# Altium PCB Eln1Project.PcbDoc
Units mm, origin at the board's own origin, x right, y up, seen from the top; angles counter-clockwise.
Board outline 30 x 30 mm, 4 copper layers (Top Layer, Layer 2, Layer 3, Bottom Layer), stack 1.57 mm thick; 31 components, 25 nets, 112 pads, 11 vias.
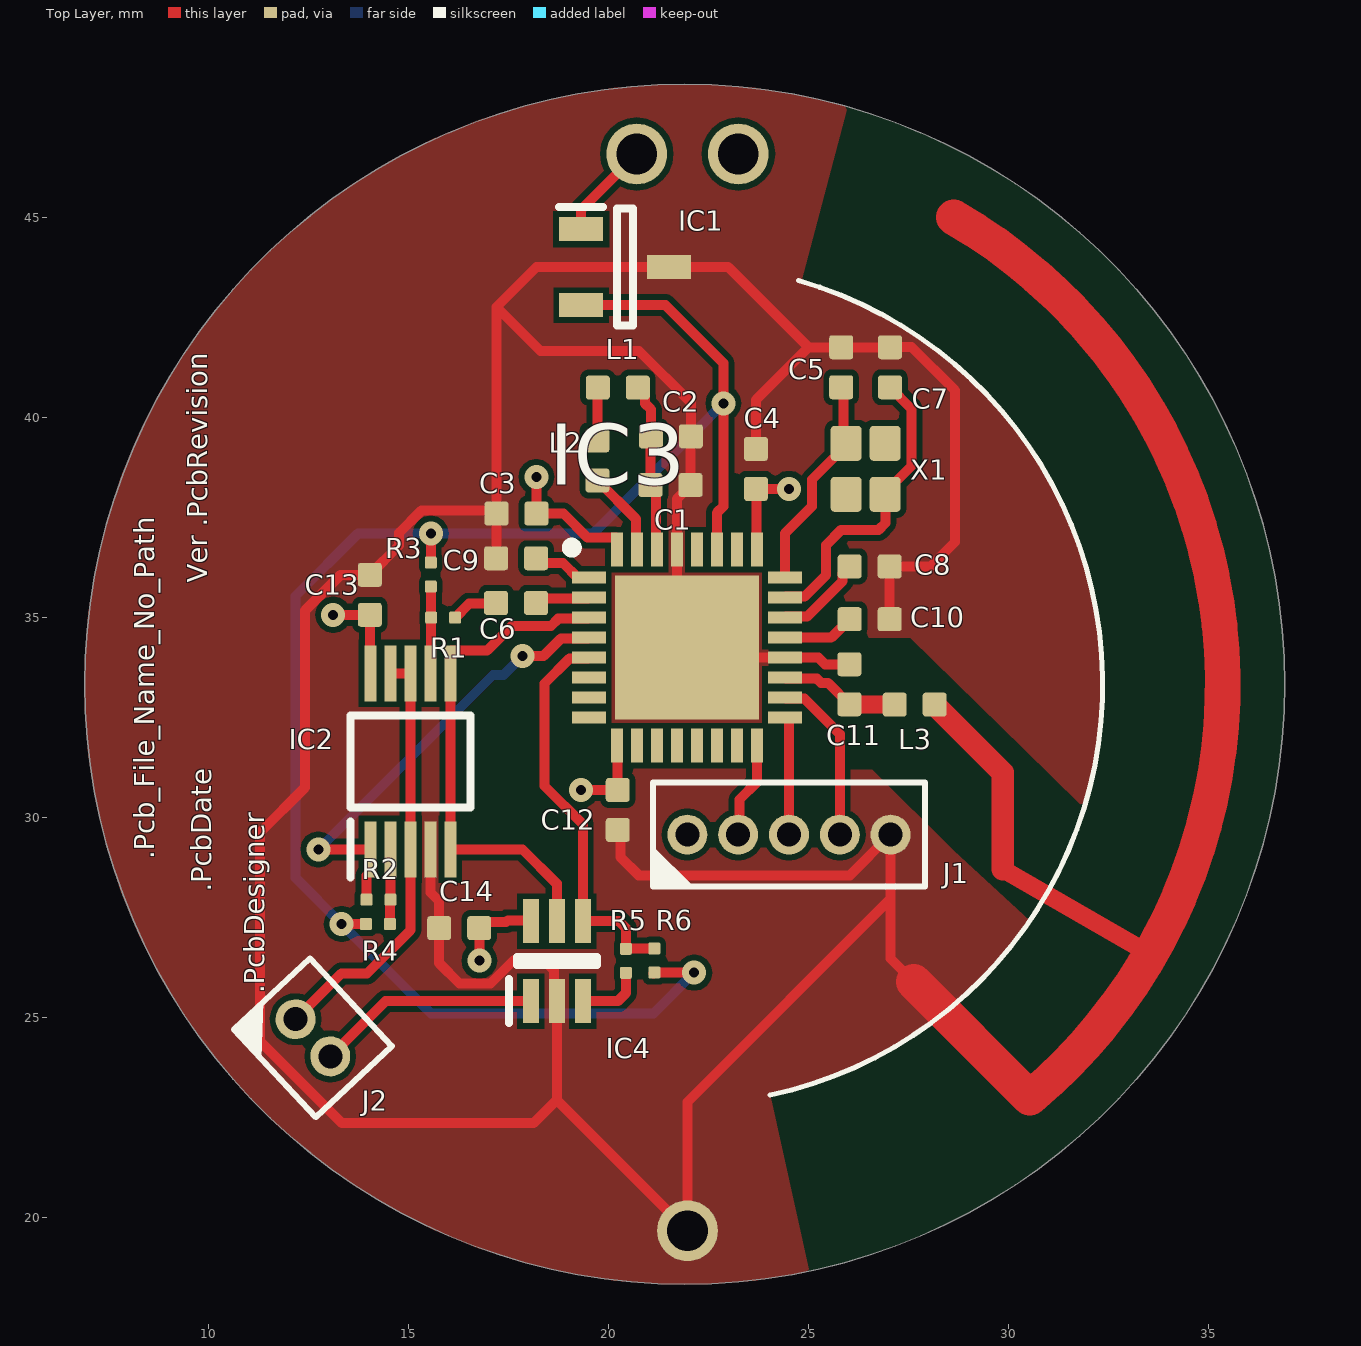
[diagram p0: Top Layer view]
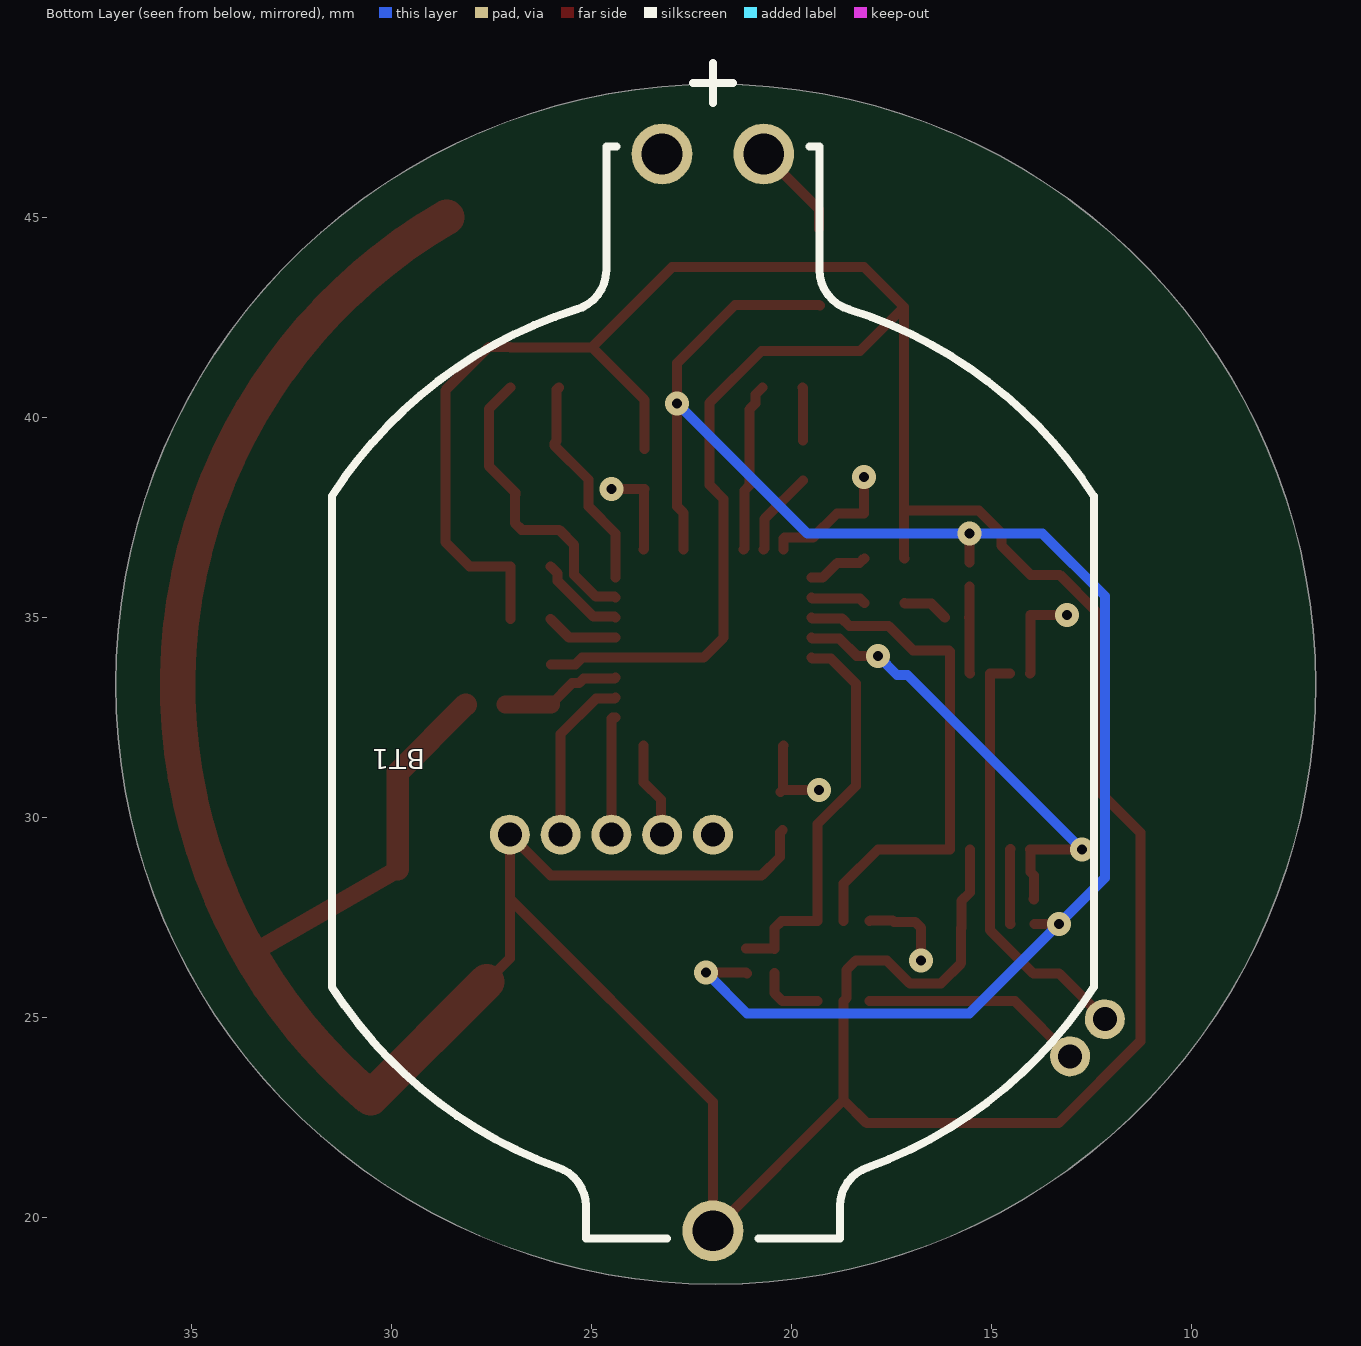
[diagram p1: Bottom Layer view, seen from below]
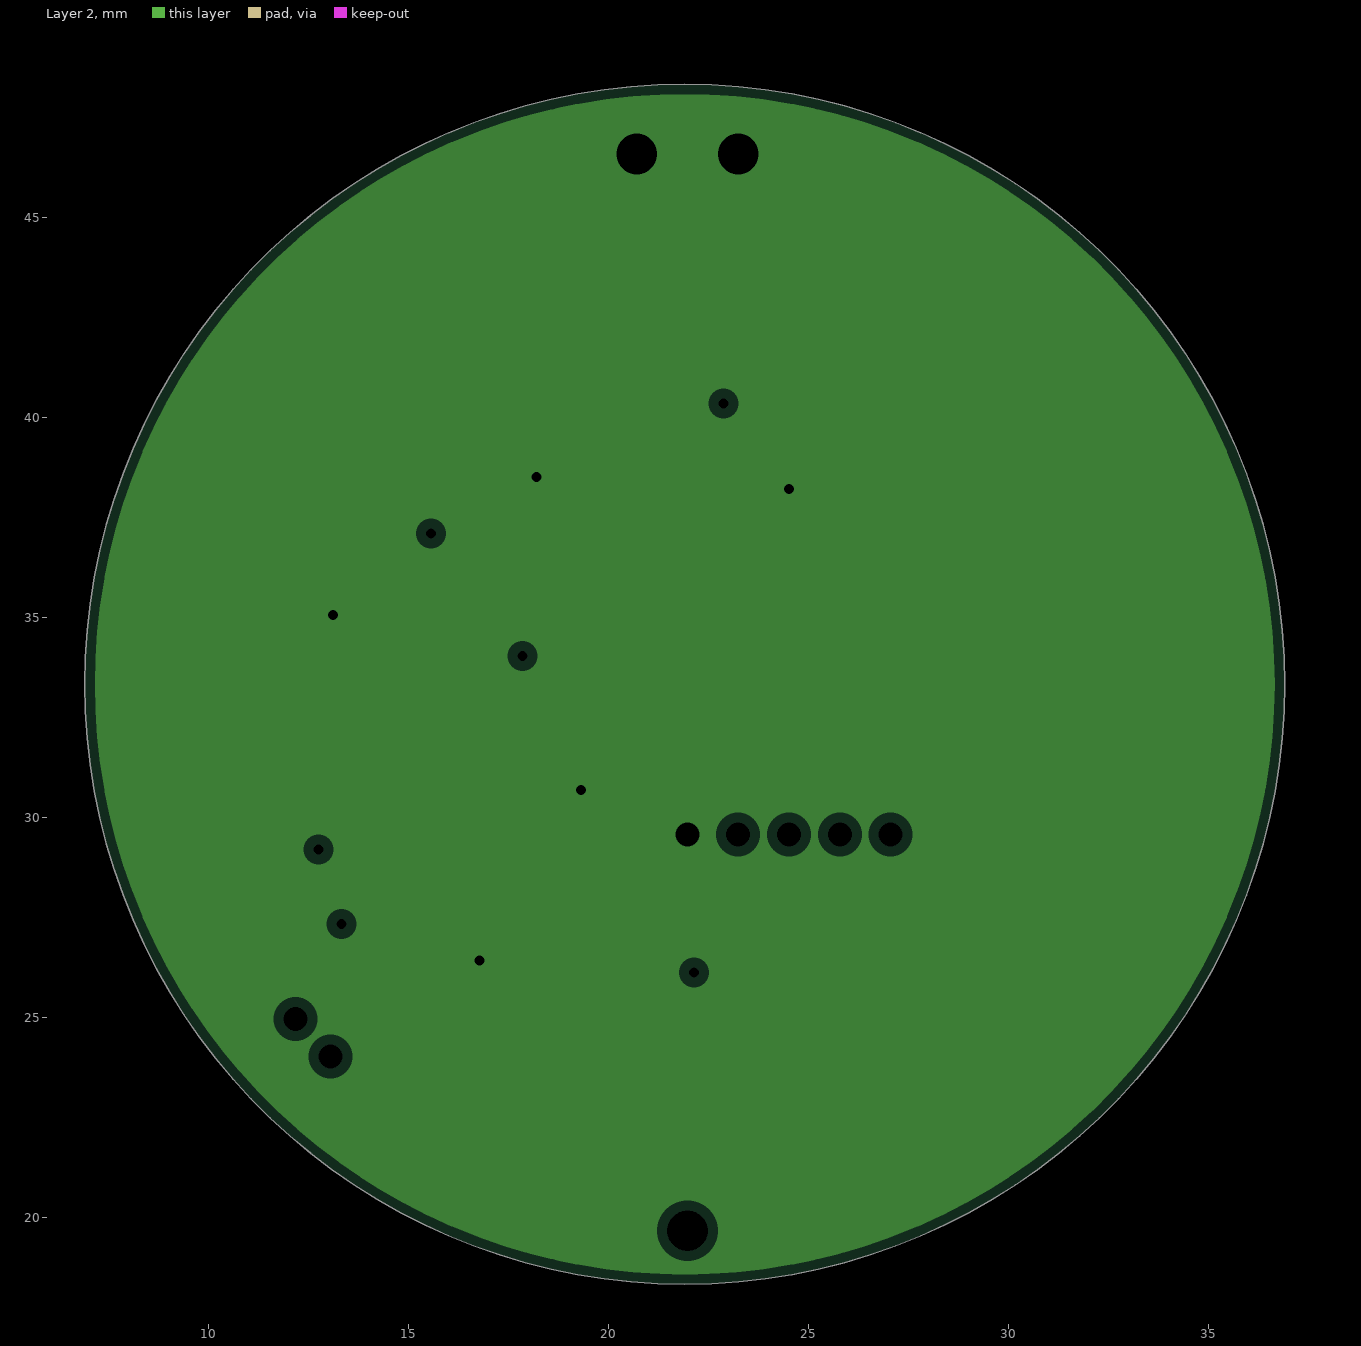
[diagram p2: Layer 2, clearances drawn from the general rule]

## Layer stack, top to bottom
Top Solder: solder mask 0.1, Solder Resist, Dk 3.5
Top Layer: signal copper 0.035
Dielectric 1: core 0.36, FR-4, Dk 4.2
Layer 2: plane copper 0.035, net VCC
Dielectric 3: prepreg 0.71, Dk 4.2
Layer 3: signal copper 0.035
Dielectric 2: core 0.36, Dk 4.2
Bottom Layer: signal copper 0.035
Bottom Solder: solder mask 0.1, Solder Resist, Dk 3.5

## Board outline
21.895,18.325 cw(c21.895,33.325) 6.895,33.325 cw(c21.895,33.325) 21.895,48.325 cw(c21.895,33.325) 36.895,33.325 cw(c21.895,33.325)

## Design rules (kind name [scope] priority, off if disabled: settings)
AcuteAngle [All] p1 off: minimum=9.00000000000000E+0001 checktracksonly=TRUE
AssemblyTestPointUsage [All] p1 off:
AssemblyTestpoint [All] p1 off: testpointundercomponent=TRUE minsize=1.016 maxsize=2.54 preferedsize=1.524 minholesize=0 maxholesize=1.016 preferedholesize=0.813 testpointgrid=0.025 usegrid=TRUE gridtolerance=0 allowsidetop=TRUE allowsidebottom=TRUE
BoardOutlineClearance [All] p1 off: gap=0.25 ignorepadtopadclearanceinfootprint=FALSE
Clearance [All] p1: gap=0.15 ignorepadtopadclearanceinfootprint=FALSE except(0: Arc-Hole Track-Hole SMDPad-Hole THPad-Hole Via-Hole Fill-Hole Poly-Hole Region-Hole Text-Hole)
ComponentClearance [All] p1 off: gap=0.25 collisioncheckmode=3 verticalgap=0.25 showdistances=FALSE
DiffPairsRouting [All] p1 off: maxlimit=0.254 minlimit=0.254 mostfreqgap=0.254 toplayer_minwidth=0.381 toplayer_maxwidth=0.381 toplayer_prefwidth=0.381 midlayer2_minwidth=0.381 midlayer2_maxwidth=0.381 midlayer2_prefwidth=0.381 bottomlayer_minwidth=0.381 bottomlayer_maxwidth=0.381 bottomlayer_prefwidth=0.381 maxuncoupledlength=12.7
FabricationTestPointUsage [All] p1 off: valid=0 allowmultiple=FALSE
FabricationTestpoint [All] p1 off: side=3 testpointundercomponent=TRUE minsize=1.016 maxsize=2.54 preferedsize=1.524 minholesize=0 maxholesize=1.016 preferedholesize=0.813 testpointgrid=0.025 allowsidetop=TRUE allowsidebottom=TRUE usegrid=TRUE gridtolerance=0
FanoutControl Fanout_BGA [IsBGA] p1 off: bgadir=Out bgaviamode=Centered fanoutstyle=Auto fanoutdirection=Alternating viagrid=0.025 // Fanout_BGA (Default Rule)
FanoutControl Fanout_LCC [IsLCC] p2 off: bgadir=Out bgaviamode=Centered fanoutstyle=Auto fanoutdirection=Alternating viagrid=0.025 // Fanout_LCC (Default Rule)
FanoutControl Fanout_SOIC [IsSOIC] p3 off: bgadir=Out bgaviamode=Centered fanoutstyle=Auto fanoutdirection=Alternating viagrid=0.025 // Fanout_SOIC (Default Rule)
FanoutControl Fanout_Small [(CompPinCount < 5)] p4 off: bgadir=Out bgaviamode=Centered fanoutstyle=Auto fanoutdirection=OutThenIn viagrid=0.025 // Fanout_Small (Default Rule)
FanoutControl Fanout_Default [All] p5 off: bgadir=Out bgaviamode=Centered fanoutstyle=Auto fanoutdirection=Alternating viagrid=0.025 // Fanout_Default (Default Rule)
Height [All] p1 off: minheight=0 maxheight=25.4 prefheight=12.7
HoleSize [All] p1: absolutevalues=TRUE maxlimit=3 minlimit=0.25 maxpercent=80.000 minpercent=20.000
HoleToHoleClearance [All] p1 off: gap=0.25 allowstackedmicrovias=TRUE
LayerPairs [All] p1 off: enforce=TRUE
MinimumAnnularRing [All] p1 off: minimumring=0.175
MinimumSolderMaskSliver [All] p1 off: minsoldermaskwidth=0
NetAntennae [All] p1 off: netantennaetolerance=0
PasteMaskExpansion [All] p1 off: expansion=0
PlaneClearance [All] p1: clearance=0.25
PlaneConnect [All] p1: planeconnectstyle=Direct reliefexpansion=0.5 reliefentries=4 reliefconductorwidth=0.25 reliefairgap=0.25
PolygonConnect [All] p1: connectstyle=Direct reliefconductorwidth=0.25 reliefentries=4 polygonreliefangle="90 Angle" airgapwidth=0.25
RoutingCorners [All] p1 off: cornerstyle=45-Degree minsetback=2.5 maxsetback=2.5
RoutingLayers [All] p1 off: top layer_v5=TRUE mid layer 2_v5=TRUE bottom layer_v5=TRUE
RoutingPriority [All] p1 off: routingpriority=0
RoutingTopology [All] p1 off: topology=Shortest
RoutingVias [All] p1: holewidth=0.25 width=0.6 viastyle="Through Hole" minholewidth=0.15 minwidth=0.5 maxholewidth=0.9 maxwidth=1.5 useviatemplates=TRUE viatemplateguid#1={857F750E-5D3C-416E-893E-D7E0D3E4223C} viatemplatename#1=v60h25m0mx0
SilkToBoardRegionClearance [All] p1 off:
SilkToSilkClearance [All] p1 off: silktosilkclearance=0
SilkToSolderMaskClearance [IsPad] p1 off: minsilkscreentomaskgap=0 clearancetoexposedcopper=TRUE
SolderMaskExpansion [All] p1: expansion=0
Width [All] p1: maxlimit=4 minlimit=0.15 preferedwidth=0.25
3 further rules are at their usual default settings.

## Components (designator, comment, footprint, x,y, rotation, side; value= is the part's Value field where it differs from the comment)
BT1 "120591-1" TECO-120591-1-2_V 21.963,33.122 r270 bottom
C1 "1uF" "CAPACITOR 1005 REFLOW" 21.539,38.303 r180 top
C2 "N.C." "CAPACITOR 1005 REFLOW" 21.547,39.522 r180 top
C3 "4.7uF" "CAPACITOR 1005 REFLOW" 17.686,37.592 r0 top
C4 "100nF" "CAPACITOR 1005 REFLOW" 23.673,38.71 r270 top
C5 "12pF" "CAPACITOR 1005 REFLOW" 25.806,41.25 r90 top
C6 "10nF" "CAPACITOR 1005 REFLOW" 17.678,35.357 r0 top
C7 "12pF" "CAPACITOR 1005 REFLOW" 27.026,41.25 r90 top
C8 "100pF" "CAPACITOR 1005 REFLOW" 26.518,36.271 r0 top
C9 "100nF" "CAPACITOR 1005 REFLOW" 17.678,36.474 r0 top
C10 "N.C." "CAPACITOR 1005 REFLOW" 26.518,34.95 r0 top
C11 "0.8pF" "CAPACITOR 1005 REFLOW" 26.01,33.325 r270 top
C12 "100nF" "CAPACITOR 1005 REFLOW" 20.218,30.183 r90 top
C13 "100nF" "CAPACITOR 1005 REFLOW" 14.021,35.56 r270 top
C14 "100nF" "CAPACITOR 1005 REFLOW" 16.256,27.229 r0 top
IC1 "ISL21080CIH315Z-TK" SOT95P237X112-3N 20.404,43.754 r0 top
IC2 "MAX9913EUB+" SOP50P490X110-10N 15.037,31.394 r90 top
IC3 "NRF52810-QCAA-T" QFN50P500X500X80-33N 21.946,34.239 r0 top
IC4 "MAX9911EXT-T" SOT65P218X110-6N 18.694,26.4 r90 top
J1 "*" "PinHeader1x5 P1.27" 24.5,29.566 r0 top
J2 "*" "PinHeader1x2 P1.27" 12.598,24.486 r313 top
L1 "15nH" "INDUCTOR 1005 REFLOW" 20.221,40.742 r0 top
L2 "10uH" "INDUCTOR 1005 REFLOW" 19.71,38.921 r90 top
L3 "3.9nH" "INDUCTOR 1005 REFLOW" 27.644,32.817 r0 top
R1 "65k" "RESISTOR 0603 REFLOW" 15.854,34.989 r0 top
R2 "20k" "RESISTOR 0603 REFLOW" 14.237,27.94 r180 top
R3 "10k" "RESISTOR 0603 REFLOW" 15.545,36.068 r270 top
R4 "10k" "RESISTOR 0603 REFLOW" 14.224,27.33 r0 top
R5 "20k" "RESISTOR 0603 REFLOW" 20.422,26.411 r270 top
R6 "10k" "RESISTOR 0603 REFLOW" 21.133,26.416 r270 top
X1 "32Mhz" "Crystal C2.0x1.6 Abracon ABM11W" 26.416,38.71 r270 top

## Footprints (in the part's own frame and the unit in brackets; to place one, negate y for a bottom-side part, rotate by r counter-clockwise, add the part's x,y. Pads: shape width x height; smd on the part's side, far side on the other; paste and mask are expansions set on the pad)
"CAPACITOR 1005 REFLOW" [mm] "Capacitor SMD 1.0x0.5mm (0402-imperial)"
  rrect25% 0.6x0.6 smd: 1(-0.5,0) 2(0.5,0)
  body extent -0.5,-0.25 0.5,0.25, height 0.5
"Crystal C2.0x1.6 Abracon ABM11W" [mm] "Crystal C2.0x1.6 Abracon ABM11W, Height 0.5mm"
  rrect25% 0.875x0.775 smd: 1(-0.637,-0.487) 2(0.637,-0.487) 3(0.637,0.487) 4(-0.637,0.487)
  body extent -1,-0.8 1,0.8, height 0.5
"INDUCTOR 1005 REFLOW" [mm] "Inductor SMD 1.0x0.5mm (0402-imperial)"
  rrect25% 0.6x0.6 smd: 1(-0.5,0) 2(0.5,0)
  body extent -0.5,-0.25 0.5,0.25, height 0.35
"PinHeader1x2 P1.27" [mm] "Plug connector"
  round 1 hole 0.6: 1(-0.635,0) 2(0.635,0)
  silkscreen extent -1.51,-1.3 1.5,1.3, body extent -1.27,-1.1 1.27,1.1, height 4
"PinHeader1x5 P1.27" [mm] "Plug connector"
  round 1 hole 0.6: 1(-2.54,0) 2(-1.27,0) 3(0,0) 4(1.27,0) 5(2.54,0)
  silkscreen extent -3.4,-1.31 3.4,1.3, body extent -3.17,-1.1 3.17,1.1, height 4
QFN50P500X500X80-33N [mm]
  rect 0.85x0.3 smd: 1(-2.45,1.75) 2(-2.45,1.25) 3(-2.45,0.75) 4(-2.45,0.25) 5(-2.45,-0.25) 6(-2.45,-0.75) 7(-2.45,-1.25) 8(-2.45,-1.75) 17(2.45,-1.75) 18(2.45,-1.25) 19(2.45,-0.75) 20(2.45,-0.25) 21(2.45,0.25) 22(2.45,0.75) 23(2.45,1.25) 24(2.45,1.75)
  rect 0.3x0.85 smd: 9(-1.75,-2.45) 10(-1.25,-2.45) 11(-0.75,-2.45) 12(-0.25,-2.45) 13(0.25,-2.45) 14(0.75,-2.45) 15(1.25,-2.45) 16(1.75,-2.45) 25(1.75,2.45) 26(1.25,2.45) 27(0.75,2.45) 28(0.25,2.45) 29(-0.25,2.45) 30(-0.75,2.45) 31(-1.25,2.45) 32(-1.75,2.45)
  rect 3.6x3.6 smd: 33(0,0)
  silkscreen extent -3,2.38 -2.75,2.62, body extent -3.68,-2.5 5.08,3.3, height 1.1
"RESISTOR 0603 REFLOW" [mm] "Resistor SMD 0.6x0.3mm (0201-imperial)"
  rrect25% 0.3x0.3 smd: 1(-0.3,0) 2(0.3,0)
  body extent -0.3,-0.15 0.3,0.15, height 0.25
SOP50P490X110-10N [mm]
  rect 1.4x0.3 smd: 1(-2.2,1) 2(-2.2,0.5) 3(-2.2,0) 4(-2.2,-0.5) 5(-2.2,-1) 6(2.2,-1) 7(2.2,-0.5) 8(2.2,0) 9(2.2,0.5) 10(2.2,1)
  silkscreen extent -2.9,-1.5 1.15,1.5, body extent -2.53,-1.52 2.53,1.52, height 1.09
SOT65P218X110-6N [mm]
  rect 1.1x0.4 smd: 1(-1,0.65) 2(-1,0) 3(-1,-0.65) 4(1,-0.65) 5(1,0) 6(1,0.65)
  silkscreen extent -1.55,-1 0.1,1.2, body extent -1.78,-1.1 1.2,1.4, height 1.1
SOT95P237X112-3N [mm]
  rect 1.1x0.6 smd: 1(-1.1,0.95) 2(-1.1,-0.95) 3(1.1,0)
  silkscreen extent -1.65,-1.46 0.2,1.5, body extent -2.67,-1.5 1.25,2.41, height 1.2
TECO-120591-1-2_V [mm] "Lithium Battery Holder"
  round 1.52 hole 1.02: 1(-13.46,-1.27) 1(-13.46,1.27) 2(13.46,0)
  silkscreen extent -15.74,-9.53 13.65,9.53, body extent -13.65,-9.53 13.65,9.52, height 6.41

## Part data
BT1: "Lithium Battery Holder for CR2032 3V Cell", Manufacturer="TE Connectivity", AccessRights=2147483647, Body Shape="Horizontal Cylindrical", ComponentLink1Description="Manufacturer URL", ComponentLink1URL=http://www.te.com/, ComponentLink2Description=Datasheet, ComponentLink2URL=http://www.te.com/commerce/DocumentDelivery/DDEController?Action=showdoc&DocId=Customer+Drawing%7F120591%7FH%7Fpdf%7FEnglish%7FENG_CD_120591_H.pdf%7F120591-1, ContentType="Unified Component", ContentTypeGUID=CB3C11C4-E317-11DF-B822-12313F0024A2, DatasheetVersion="Rev. H, 01/2013", Folder="Unified Components\Components\TE Connectivity\Connectors & Connector Components\Power Products\Battery Interconnection Products\", FolderGUID=A6761B51-D489-48A3-9180-F4808F45AB79, ItemGUID=B2C50140-681E-4F62-8DBB-9728605318CE, ItemHRID=CMP-0438-00001, LifeCycle=Released, LifeCycleStateGUID=61E382EE-6656-4F12-9E24-BE9327104A25, Mounting Technology="Through Hole", PackageDescription="Lithium Battery Holder", PackageReference=120591-1, Packing Type=Tray, PartNumber=120591-1, ReleaseDate="20/08/2013 02:50:22 AM", RevisionId=1
C1 C2 C3 C4 C5 C6 C7 C8 C9 C10 C11 C12 C13 C14: library part Capacitor, "Capacitor"
IC1: "Integrated Circuit", Manufacturer_Name="Renesas Electronics", Mouser Part Number=968-ISL21080CIH315ZT, Datasheet Link=https://www.renesas.com/en-us/www/doc/datasheet/isl21080.pdf, Height=1.12mm, Manufacturer_Part_Number=ISL21080CIH315Z-TK, Mouser Price/Stock=http://www.mouser.com/Search/ProductDetail.aspx?qs=9fLuogzTs8LxZWNzls3EKw%3d%3d
IC2 IC4: "Integrated Circuit", Manufacturer_Name="Maxim Integrated", Height=1.1mm
  IC2: Datasheet Link=https://altium.componentsearchengine.com/Datasheets/1/MAX9913EUB+.pdf, Manufacturer_Part_Number=MAX9913EUB+
  IC4: Datasheet Link=https://datasheets.maximintegrated.com/en/ds/MAX9910-MAX9913.pdf, Manufacturer_Part_Number=MAX9911EXT-T
IC3: "Integrated Circuit", Manufacturer_Name="Nordic Semiconductor", Mouser Part Number=949-NRF52810-QCAA-T, RS Part Number=1697120P, Datasheet Link=https://componentsearchengine.com/Datasheets/1/nRF52810-QCAA-T.pdf, Height=0.8mm, Manufacturer_Part_Number=NRF52810-QCAA-T, Mouser Price/Stock=https://www.mouser.co.uk/ProductDetail/Nordic-Semiconductor/nRF52810-QCAA-T?qs=5aG0NVq1C4ykfpvypn%2FnAA%3D%3D, RS Price/Stock=http://uk.rs-online.com/web/p/products/1697120P
J1: library part PinHeader1x5, "Plug connector"
J2: library part PinHeader1x2, "Plug connector"
L1 L2 L3: library part Inductor, "Inductor"
R1 R2 R3 R4 R5 R6: library part Resistor, "Resistor"
X1: library part "Crystal C2.0x1.6 Abracon ABM11W", "Crystal C2.0x1.6 Abracon ABM11W"

## Via types
v1: diameter 0.6, hole 0.25, Top Layer to Bottom Layer, tented both sides, 11 vias

## Nets (pads, with @x,y where several pads share a name; then routed paths per layer and width w, separated by ;. In a path a pad name is that pad's centre, name@x,y a point inside that pad or via, vN(x,y) a via of type N, cw(c..) or ccw(c..) an arc to the next point about the centre after c; other vN are vias at no path point)
AGND: IC1.2 IC3.27 R3.1 R4.1 R6.2 | length 42.8
  Top Layer w0.25: v1(13.316,27.33) R4.1 ; R3.1 v1(15.545,37.088) ; IC1.2@19.289,42.789 IC1.2 21.407,42.804 22.86,41.351 v1(22.86,40.349) 22.86,37.775 22.696,37.61 IC3.27 ; R6.2@21.115,26.098 R6.2 v1(22.131,26.116)
  Bottom Layer w0.25: v1(22.131,26.116) 21.11,25.095 15.551,25.095 v1(13.316,27.33) 12.16,28.486 12.16,35.528 13.72,37.088 v1(15.545,37.088) 19.598,37.088 v1(22.86,40.349)
NetC1_2: C1.2 C2.2 IC3.30 L1.2 | length 4.3
  Top Layer w0.25: L1.2 20.895,40.567 20.895,40.349 21.047,40.197 C2.2 21.043,39.518 21.043,38.307 C1.2 21.171,38.172 21.171,36.714 IC3.30
NetC5_1: C5.1 IC3.24 X1.1 | length 5.4
  Top Layer w0.25: IC3.24 24.396,37.096 25.075,37.775 25.075,38.443 25.929,39.297 X1.1 25.867,39.408 25.867,40.689 C5.1
NetC6_1: C6.1 R1.2 | length 1.2
  Top Layer w0.25: R1.2 16.503,35.338 17.16,35.338 C6.1
NetC7_1: C7.1 IC3.23 X1.3 | length 7.6
  Top Layer w0.25: IC3.23 24.421,35.514 24.885,35.514 25.429,36.059 25.429,36.808 25.806,37.186 26.742,37.186 26.914,37.358 26.914,38.062 X1.3 26.903,38.122 27.566,38.785 27.566,40.209 C7.1
NetC8_1: C8.1 IC3.22 | length 2.3
  Top Layer w0.25: IC3.22 24.421,35.014 24.95,35.014 25.843,35.907 25.843,36.096 C8.1
NetC9_2: C9.2 IC3.1 | length 1.5
  Top Layer w0.25: C9.2 18.296,36.356 18.853,36.356 19.221,35.989 IC3.1
NetC10_1: C10.1 IC3.21 | length 1.8
  Top Layer w0.25: IC3.21 25.556,34.489 C10.1
NetC11_2: C11.2 IC3.19 L3.1 | length 3
  Top Layer w0.25: IC3.19 24.421,33.464 25.195,33.464 25.306,33.353 25.481,33.353 C11.2@26.014,32.821 ; L3.1@27.14,32.821 L3.1
  Top Layer w0.457: C11.2@26.014,32.821 L3.1@27.14,32.821
NetIC2_2: IC2.2 R2.1 R4.2 | length 1.9
  Top Layer w0.25: R4.2 14.53,27.337 14.53,27.934 R2.1 IC2.2 IC2.2@14.529,29.202
NetIC2_7: IC2.7 R1.1 R3.2 | length 2.2
  Top Layer w0.25: IC2.7 15.546,33.603 15.546,34.98 R1.1 15.55,34.994 R3.2@15.55,35.768
NetIC3_31: IC3.31 L2.1 | length 2.1
  Top Layer w0.25: L2.1 20.671,37.461 20.671,36.714 IC3.31
NetIC4_3: IC4.3 R5.2 | length 1.7
  Top Layer w0.25: IC4.3 20.221,25.4 20.422,25.601 R5.2
NetL1_1: L1.1 L2.2 | length 1.3
  Top Layer w0.25: L2.2 19.716,39.426 19.716,40.736 L1.1
NRESET: IC3.16 J1.2 | length 2.4
  Top Layer w0.25: J1.2 23.262,29.598 23.262,30.441 23.696,30.874 IC3.16
shdEn: IC2.5 IC2.6 IC3.3 IC4.5 | length 12.7
  Top Layer w0.25: IC4.5 18.694,28.338 17.838,29.194 IC2.5 IC2.6 16.037,34.144 16.062,34.169 16.955,34.169 17.567,34.782 18.548,34.782 18.731,34.964 19.471,34.964 IC3.3
sigIn: IC2.3 IC2.8 IC2.9 J2.1 | length 10.7
  Top Layer w0.25: J2.1 13.307,26.091 13.951,26.091 15.037,27.176 IC2.3 IC2.8 IC2.9
sigOut: IC4.1 J2.2 | length 5.6
  Top Layer w0.25: J2.2 14.411,25.4 IC4.1
SWDCLK: IC3.17 J1.3 | length 3
  Top Layer w0.25: IC3.17 24.475,32.489 24.5,32.464 J1.3
SWDIO: IC3.18 J1.4 | length 4.3
  Top Layer w0.25: IC3.18 24.421,32.964 24.885,32.964 25.77,32.079 J1.4
VCC: BT1.1 C3.2 C4.2 C12.2 C13.2 C14.2 IC1.1 IC2.10 IC3.9 IC3.25 IC3.32 IC4.6 J1.1 | length 15
  Top Layer w0.25: v1(13.106,35.06) C13.2 14.029,35.052 14.029,33.602 IC2.10 ; v1(16.76,26.416) 16.76,27.225 C14.2 16.913,27.386 17.431,27.386 17.469,27.424 18.02,27.424 IC4.6 ; v1(18.186,38.506) C3.2 18.861,37.592 19.464,36.989 20.171,36.989 20.196,36.964 IC3.32 ; v1(19.304,30.683) C12.2 ; IC1.1 19.304,45.192 BT1.1@20.693,46.582 ; IC3.9 20.207,31.778 20.207,30.695 C12.2 ; C12.2@20.27,30.632 C12.2 ; IC3.25 23.684,36.701 23.684,38.198 C4.2 v1(24.5,38.21)
Vin: C6.2 IC3.2 | length 1.4
  Top Layer w0.25: C6.2 18.286,35.464 19.471,35.464 IC3.2
Vout1: IC2.1 IC3.4 R2.2 | length 11.5
  Top Layer w0.25: v1(12.735,29.194) IC2.1 ; R2.2@13.948,27.951 R2.2 13.937,28.544 14.023,28.631 IC2.1@14.023,29.181 ; v1(17.838,34.036) 18.368,34.036 18.796,34.464 19.471,34.464 IC3.4
  Bottom Layer w0.25: v1(12.735,29.194) 17.1,33.559 17.361,33.559 v1(17.838,34.036)
Vout2: IC3.5 IC4.4 R5.1 R6.1 | length 10.1
  Top Layer w0.25: IC3.5 19.471,33.964 19.007,33.964 18.39,33.347 18.39,30.784 19.344,29.83 IC4.4 20.25,27.4 20.422,27.229 R5.1 20.424,26.714 21.13,26.714 R6.1
VSS: BT1.2 C1.1 C2.1 C3.1 C4.1 C5.2 C7.2 C8.2 C9.1 C10.2 C11.1 C12.1 C13.1 C14.1 IC1.3 IC2.4 IC3.20 IC3.29 IC3.33 IC4.2 J1.5 L3.2 | length 147.6
  Top Layer w0.25: IC2.4 15.537,28.119 15.752,27.904 15.752,27.232 C14.1 15.756,26.351 16.266,25.841 17.04,25.841 17.615,26.416 18.39,26.416 18.619,26.186 18.619,25.475 IC4.2 18.694,22.93 ; C9.1 17.182,36.478 17.182,37.588 C3.1 ; C12.1 20.284,29.618 20.284,29.008 20.742,28.55 26.024,28.55 J1.5 27.04,27.961 ; C4.1 23.673,40.437 24.986,41.75 ; C11.1 25.4,33.825 25.236,33.989 IC3.20 22.196,33.989 IC3.33 21.696,34.489 IC3.29 21.696,37.96 C1.1 22.043,38.307 22.043,39.518 C2.1 22.047,40.36 20.751,41.656 18.284,41.656 17.186,42.754 ; C10.2 C8.2 28.042,36.271 28.651,36.881 28.651,40.672 27.566,41.758 27.034,41.758 C7.2 C5.2 24.986,41.75 ; 27.616,25.889 27.04,26.465 27.04,27.961 ; C3.1 17.186,42.754 ; C3.1 17.116,37.663 15.307,37.663 14.751,37.107 14.751,36.79 C13.1 13.293,36.06 12.395,35.162 12.395,30.738 11.278,29.621 11.278,24.398 13.323,22.352 18.116,22.352 18.694,22.93 ; 17.186,42.754 18.186,43.754 IC1.3 22.981,43.754 24.986,41.75 ; 18.694,22.93 BT1.2 21.963,22.884 27.04,27.961
  Top Layer w0.254: 30.522,22.983 30.522,23.103
  Top Layer w0.457: 29.84,28.699 33.535,26.575
  Top Layer w0.559: L3.2 29.84,31.12 29.84,28.699
  Top Layer w0.889: 27.616,25.889 30.522,22.983 ccw(c21.844,33.325) 28.614,45.004
pads on no net: IC3.6 IC3.7 IC3.8 IC3.10 IC3.11 IC3.12 IC3.13 IC3.14 IC3.15 IC3.26 IC3.28 X1.2 X1.4

## Polygon pours and split planes (outlines as drawn)
VSS on Top Layer "Top Layer-No Net" (solid, remove dead copper, pour order 21): 21.895,18.325 cw(c21.895,33.325) 6.895,33.325 cw(c21.895,33.325) 21.895,48.325 cw(c21.895,33.325) 36.895,33.325 cw(c21.895,33.325)
VCC on Layer 2 (split plane): 185 vertices, not listed, extent 7.145,18.575 36.644,48.074

## Other copper
Top Layer:
  pour cut-out: 23.978,34.493 27.532,34.483 30.378,31.699 31.859,30.251 30.988,26.754 30.516,27.412 28.614,29.159 26.582,31.191 23.978,31.191
  pour cut-out: 25.97,47.773 24.806,43.383 25.686,43.084 26.613,42.672 27.48,42.164 28.448,41.477 29.261,40.75 29.972,39.982 30.548,39.196 31.09,38.331 31.394,37.739 31.699,36.989 32.004,35.991 32.207,35.089 32.309,34.052 32.309,32.512 32.207,31.699 32.085,30.99 31.902,30.296 31.699,29.683 31.293,28.74 30.754,27.754 30.278,27.069 29.769,26.416 29.058,25.692 28.245,24.985 27.125,24.238 25.97,23.673 24.885,23.278 24.028,23.047 24.994,18.694 37.666,18.694 37.666,47.676
  pour cut-out: 26.315,47.65
  pour cut-out: 25.556,47.854

## Silkscreen, mask and mechanical layers (free items; w line width, h text height)
Top Overlay:
  lines w0.127: 24.027,23.054 ccw(c21.844,33.325) 24.738,43.418
  text "Ver .PcbRevision" at 9.957,35.865 h0.5 r90
  text ".Pcb_File_Name_No_Path" at 8.636,28.956 h0.5 r90
  text ".PcbDate" at 10.058,28.143 h0.5 r90
  text ".PcbDesigner" at 11.379,25.603 h0.5 r90
Mechanical 1:
  circle w0.254: c21.895,33.325 r15
Mechanical 13:
  lines w0.254: 6.909,33.426 6.909,52.324 ; 7.112,51.308 6.909,51.308 ; 7.823,50.495 7.01,51.308 ; 7.823,52.222 6.909,51.308 ; 35.966,50.495 36.779,51.308 36.881,51.308 ; 35.966,52.222 36.881,51.308 ; 36.881,33.325 36.881,52.121 ; 6.909,51.308 7.01,51.308 ; 6.909,51.308 7.01,51.308 ; 6.909,51.308 36.881,51.308
  text "30mm" at 19.101,52.121 h1.52